# Altium PCB PCB3.PcbDoc
Units mm, origin at the board's own origin, x right, y up, seen from the top; angles counter-clockwise.
Board outline 152.4 x 101.6 mm, 2 copper layers (Top Layer, Bottom Layer); 9 components, 5 nets, 27 pads, 0 vias.
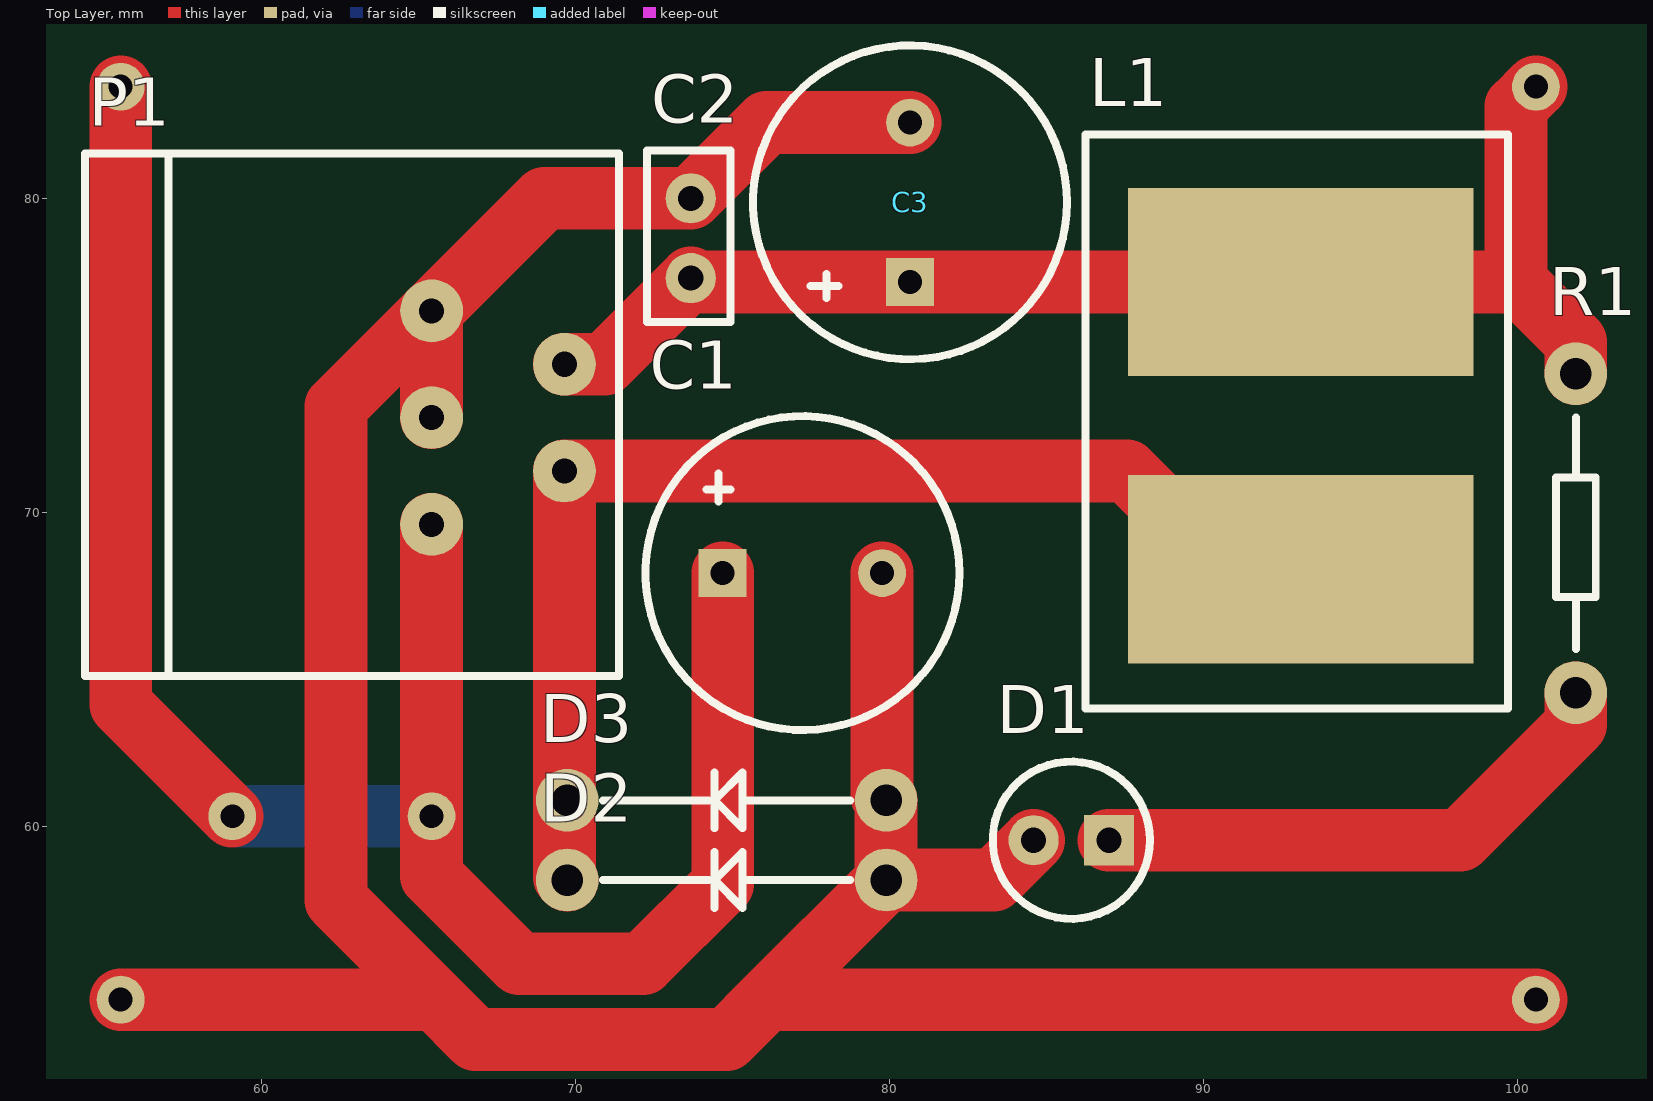
[diagram p0: Top Layer view]
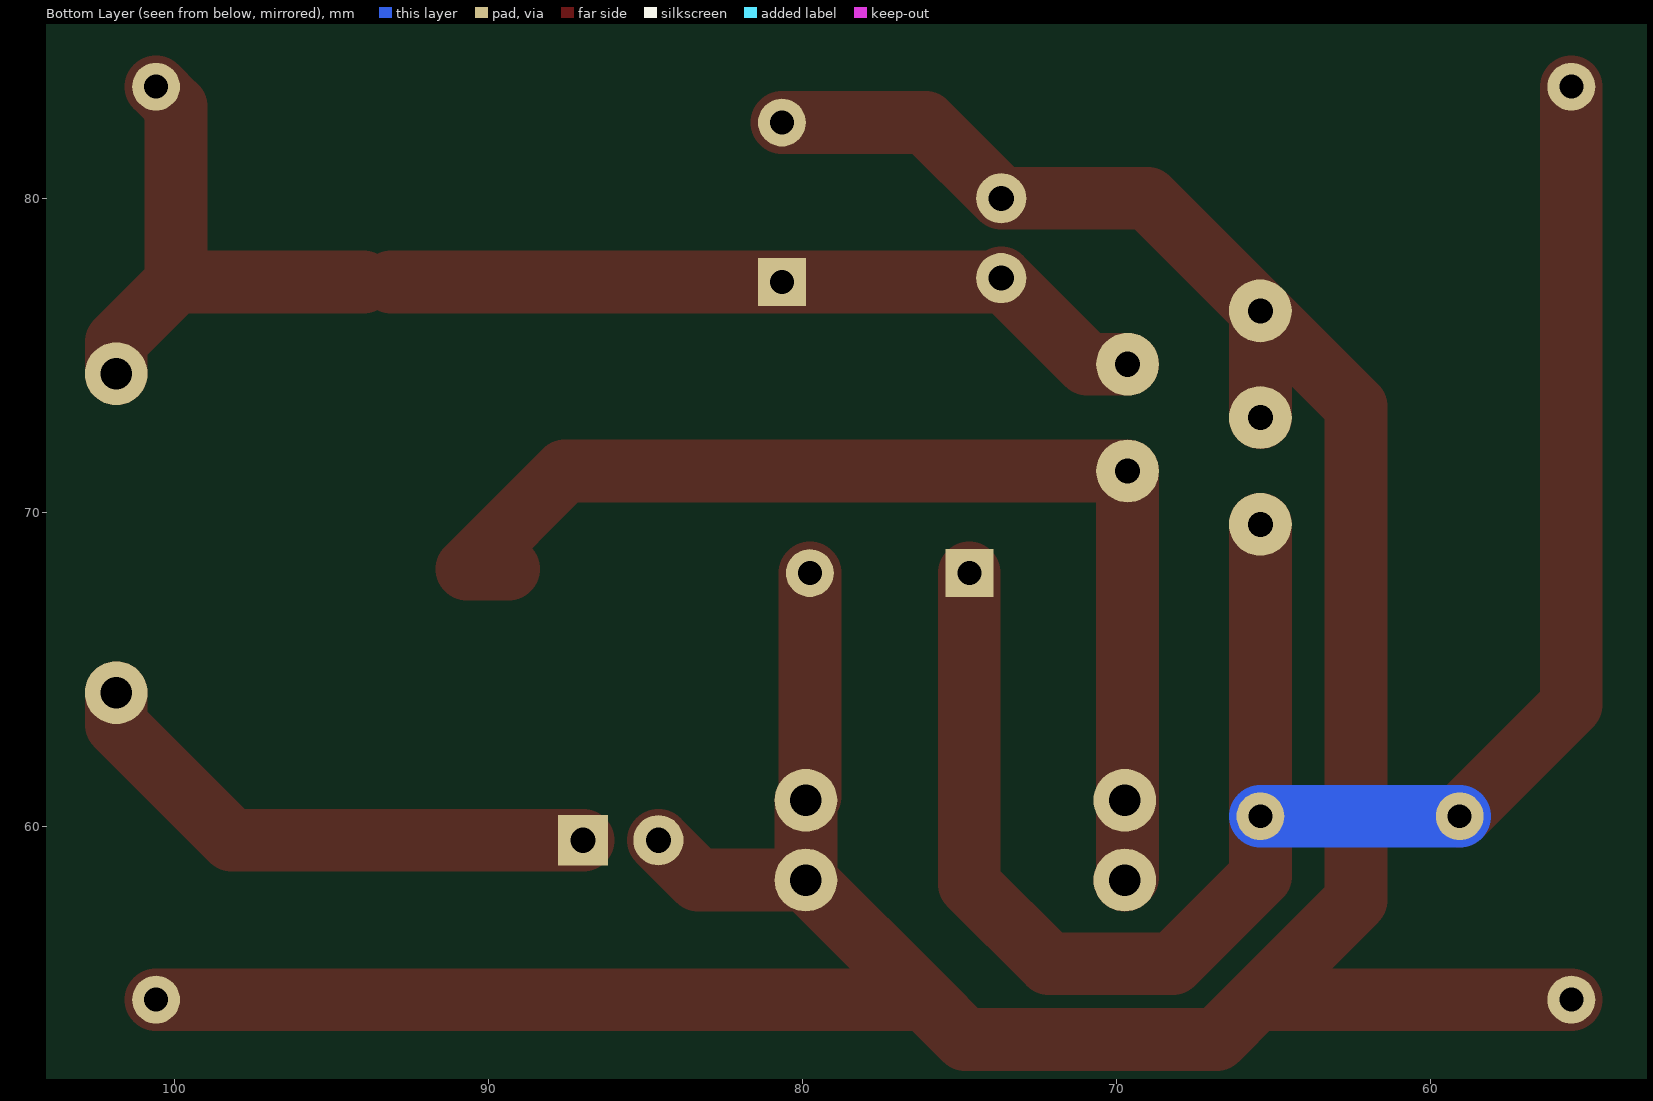
[diagram p1: Bottom Layer view, seen from below]

## Layer stack, top to bottom
Top Solder: solder mask 0.0102, Solder Resist, Dk 3.5
Top Layer: signal copper 0.0356
Dielectric 1: dielectric 0.32, FR-4, Dk 4.8
Bottom Layer: signal copper 0.0356
Bottom Solder: solder mask 0.0102, Solder Resist, Dk 3.5

## Board outline
25.4,25.4 177.8,25.4 177.8,127 25.4,127

## Design rules (kind name [scope] priority, off if disabled: settings)
Clearance [All] p1: gap=0.254 ignorepadtopadclearanceinfootprint=FALSE except(0: Arc-Hole Track-Hole SMDPad-Hole THPad-Hole Via-Hole Fill-Hole Poly-Hole Region-Hole Text-Hole)
PolygonConnect [All] p1: connectstyle=Relief reliefconductorwidth=0.254 reliefentries=4 polygonreliefangle="90 Angle" airgapwidth=0.254
RoutingVias [All] p1: holewidth=0.711 width=1.27 viastyle="Through Hole" minholewidth=0.711 minwidth=1.27 maxholewidth=0.711 maxwidth=1.27
SolderMaskExpansion [All] p1: expansion=0.102
Width [All] p1: maxlimit=5 minlimit=0.254 preferedwidth=0.254
30 further rules are at their usual default settings.

## Components (designator, comment, footprint, x,y, rotation, side; value= is the part's Value field where it differs from the comment)
C1 "Cap Pol1" C_470uF 77.216,68.072 r0 top value=470uF
C2 "Cap Pol1" C-pF 73.66,77.47 r90 top value=0.1uF
C3 "Cap Pol1" C_470uF 80.645,79.883 r90 top value=470uF
D1 "LED1" LED 86.982,59.563 r180 top
D2 "D Schottky" Diode 79.883,58.293 r180 top
D3 "D Schottky" Diode 79.883,60.833 r180 top
L1 "68uH" L- 93.091,68.199 r90 top
P1 "LM2596T" LM2596-ChaJian 65.405,69.625 r180 top
R1 "Res2" R 101.854,64.262 r90 top value=1K

## Footprints (in the part's own frame and the unit in brackets; to place one, negate y for a bottom-side part, rotate by r counter-clockwise, add the part's x,y. Pads: shape width x height; smd on the part's side, far side on the other; paste and mask are expansions set on the pad)
C-pF [mm]
  round 1.6 hole 0.8 unplated: 1(0,0) 2(2.54,0)
  silkscreen extent -1.4,-1.27 4.06,1.4
C_470uF [mil]
  rect 60x60 hole 30: 1(-100,0)
  round 60 hole 30: 2(100,0)
  silkscreen extent -197,-197 197,197
Diode [mm]
  round 2 hole 1: 1(0,0) 2(10.16,0)
  silkscreen extent 1.14,-0.89 9.02,0.89
L- [mm]
  rect 6x11 smd: 1(0,0) 2(9.144,0)
  silkscreen extent -4.45,-6.6 13.84,6.86
LED [mm]
  rect 1.6x1.6 hole 0.8 unplated: 1(0,0)
  round 1.6 hole 0.8 unplated: 2(2.4,0)
  silkscreen extent -1.3,-2.5 3.7,2.5
LM2596-ChaJian [mm]
  round 2 hole 0.8: 1(0,0) 2(-4.23,-1.7) 3(0,-3.4) 4(-4.23,-5.1) 5(0,-6.8)
  silkscreen extent -5.97,-11.81 11.05,4.83
R [mm]
  round 2 hole 1: 1(0,0) 2(10.16,0)
  silkscreen extent 1.4,-0.63 8.76,0.64

## Part data
C1 C2 C3: "Polarized Capacitor (Radial)", LatestRevisionDate=17-Jul-2002, LatestRevisionNote="Re-released for DXP Platform.", PackageDescription="Polarized Capacitor (Radial); 2 Leads", PackageReference=RB7.6-15, Published=8-Jun-2000, Publisher="Altium Limited"
D1: "Typical RED GaAs LED", LatestRevisionDate=08-Jul-2005, LatestRevisionNote="Mech Layer 1 removed.", PackageDescription="LED; 2 Leads", PackageReference=LED-1, Published=8-Jun-2000, Publisher="Altium Limited"
D2 D3: "Schottky Diode", Code_JEDEC=DO-214-AA, LatestRevisionDate=17-Jul-2002, LatestRevisionNote="Re-released for DXP Platform.", PackageDescription="DO-214-AA/SMB; 2 C-Bend Leads; Body 5.3 x 3.6 mm, inc. leads (LxW)", PackageReference=SMB, Published=8-Jun-2000, Publisher="Altium Limited"
L1: library part L
R1: "Resistor", LatestRevisionDate=17-Jul-2002, LatestRevisionNote="Re-released for DXP Platform.", PackageDescription="Axial Device, Thru-Hole; 2 Leads; 0.4 in Pin Spacing", PackageReference=AXIAL-0.4, Published=8-Jun-2000, Publisher="Altium Limited"

## Free pads (board coordinates)
  round 1.524 hole 0.762: 2(55.499,83.566) 3(55.499,54.483) 4(100.584,54.483) 5(100.584,83.566) 6(65.405,60.325) 7(59.055,60.325)

## Nets (pads, with @x,y where several pads share a name; then routed paths per layer and width w, separated by ;. In a path a pad name is that pad's centre, name@x,y a point inside that pad or via, vN(x,y) a via of type N, cw(c..) or ccw(c..) an arc to the next point about the centre after c; other vN are vias at no path point)
5V: C2.1 C3.1 L1.2 P1.4 pad.5 R1.2 | length 40.8
  Top Layer w2: P1.4 70.915,74.725 C2.1 73.787,77.343 C3.1 L1.2 ; L1.2@93.98,77.343 99.949,77.343 ; pad.5 99.949,82.931 99.949,77.343 ; R1.2 101.854,75.438 99.949,77.343
GND: C1.2 C2.2 C3.2 D1.2 D2.1 D3.1 P1.3 P1.5 pad.3 pad.4 | length 112.2
  Top Layer w2: pad.3 65.532,54.483 ; P1.3 P1.5 ; C1.2 79.756,60.96 D3.1 D2.1 ; C3.2 76.073,82.423 C2.2 68.99,80.01 P1.5 ; D1.2 83.312,58.293 D2.1 ; pad.4 76.073,54.483 ; P1.5 62.357,73.377 62.357,57.658 65.532,54.483 ; 65.532,54.483 66.802,53.213 74.803,53.213 76.073,54.483 ; 76.073,54.483 D2.1
NetD1_1: D1.1 R1.1 | length 17.4
  Top Layer w2: D1.1 98.171,59.563 101.854,63.246 R1.1
NetD2_2: D2.2 D3.2 L1.1 P1.2 | length 36.7
  Top Layer w2: D2.2 69.635,58.381 P1.2 87.552,71.325 90.678,68.199 L1.1@89.359,68.199
VCC: C1.1 P1.1 pad.2 pad.6 pad.7 | length 63.7
  Top Layer w2: pad.2 55.499,63.881 pad.7 ; P1.1 pad.6 65.405,58.42 68.199,55.626 72.136,55.626 74.676,58.166 C1.1
  Bottom Layer w2: pad.7 pad.6